# EAGLE board pcb-2d-final-final (EAGLE 9.7.0)
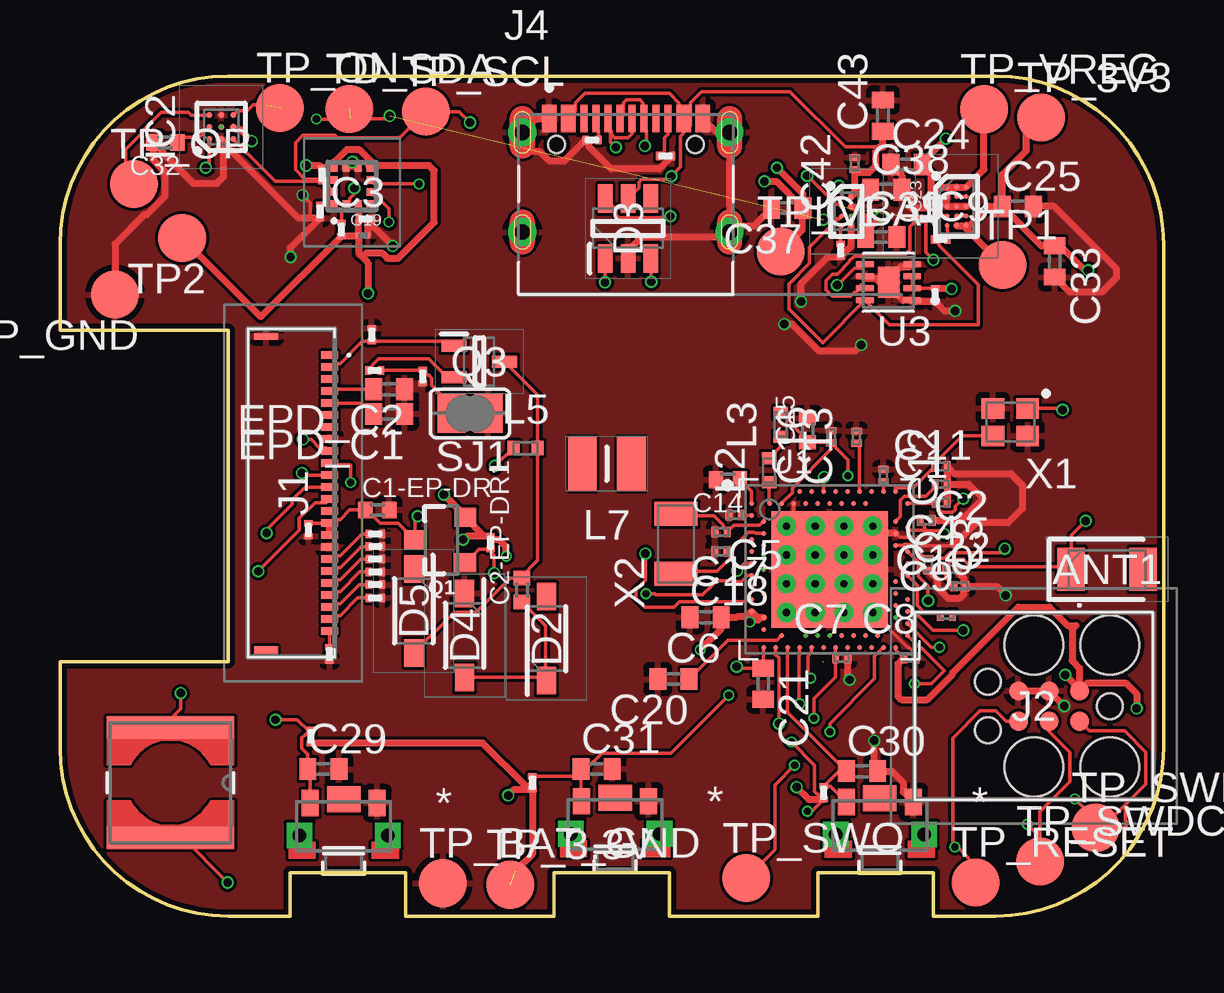
[diagram p0: board, top side]
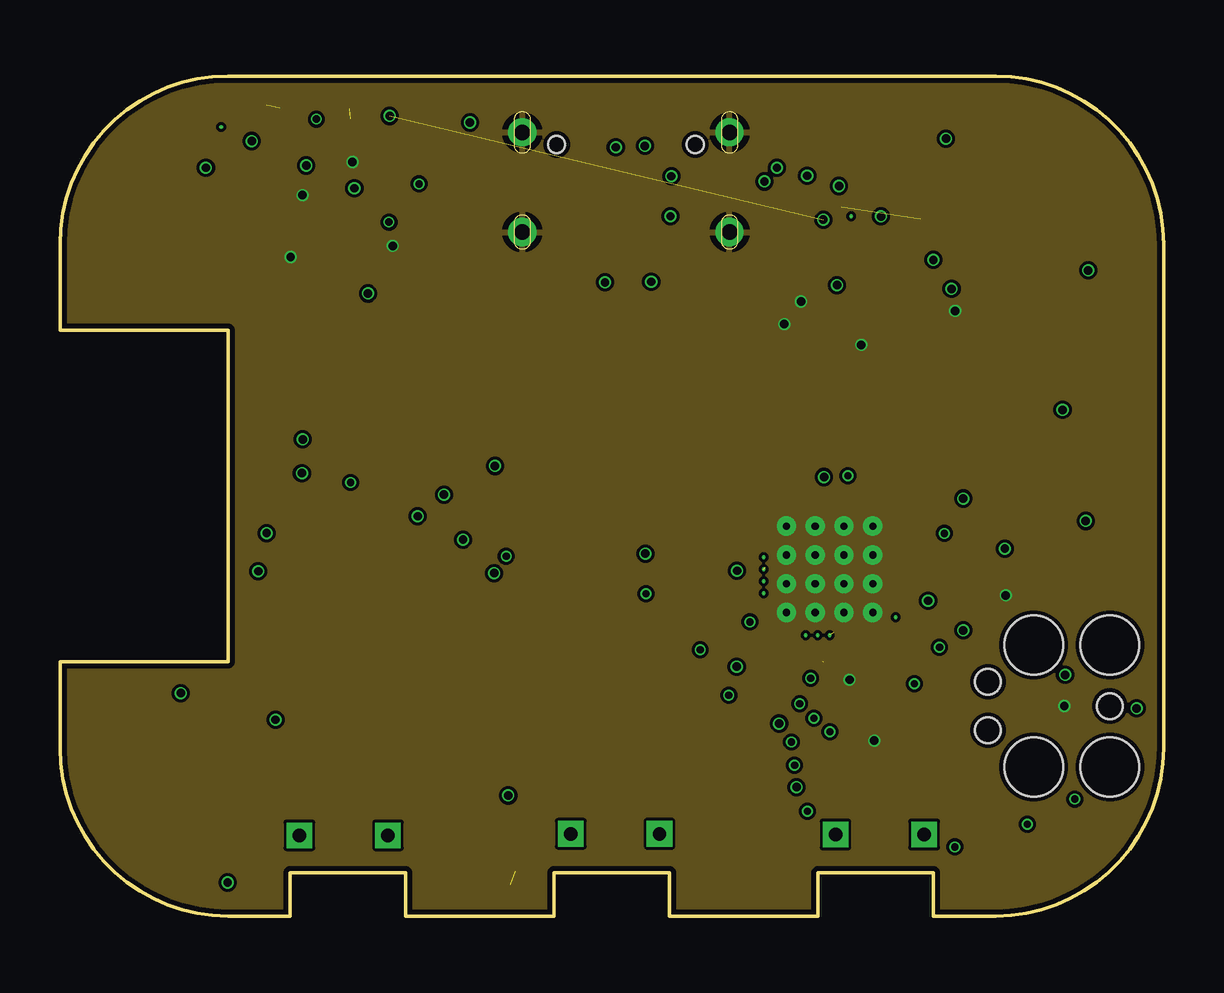
[diagram p1: board, inner layer Route2]
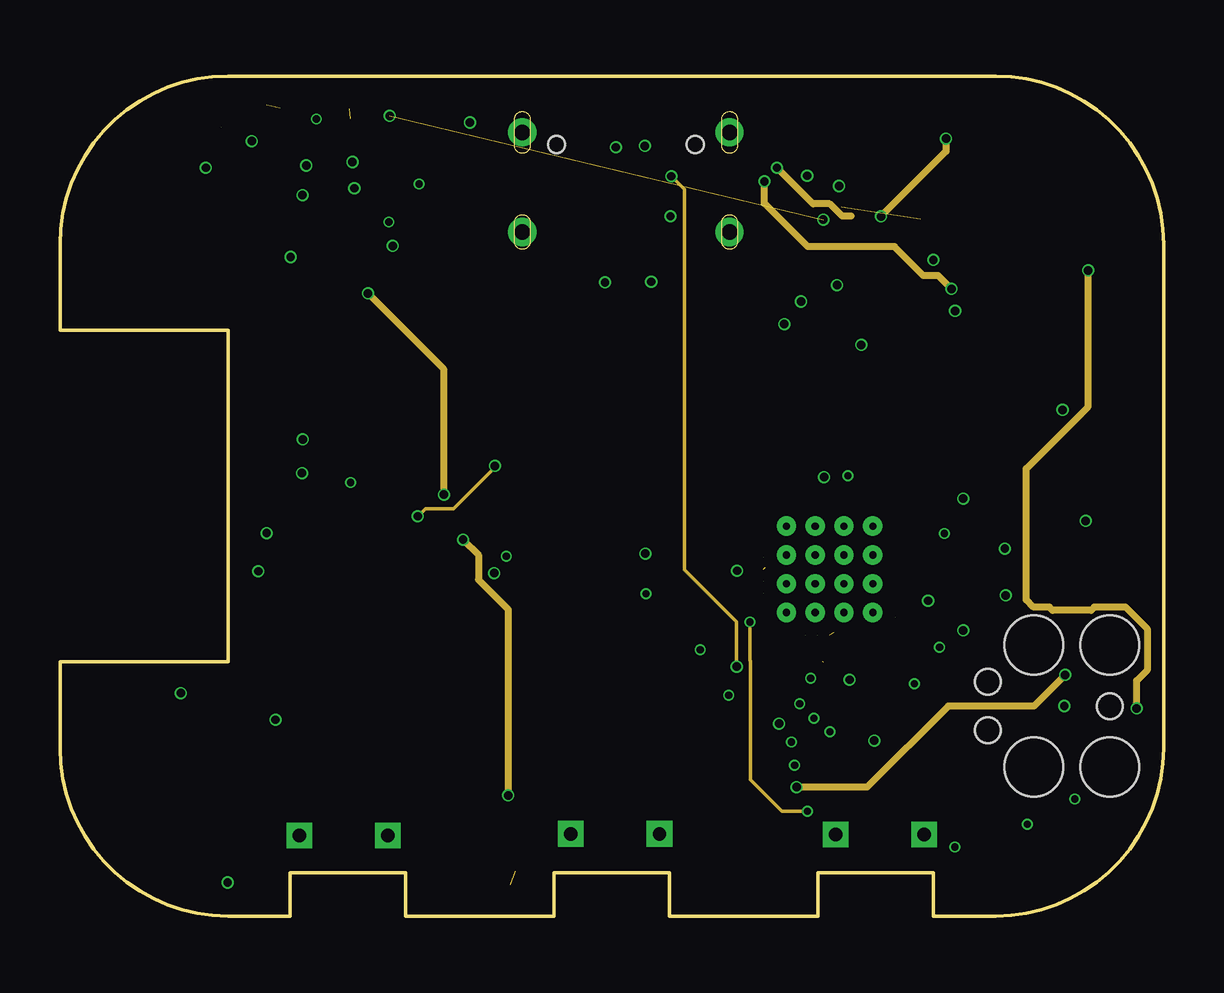
[diagram p2: board, inner layer Route15]
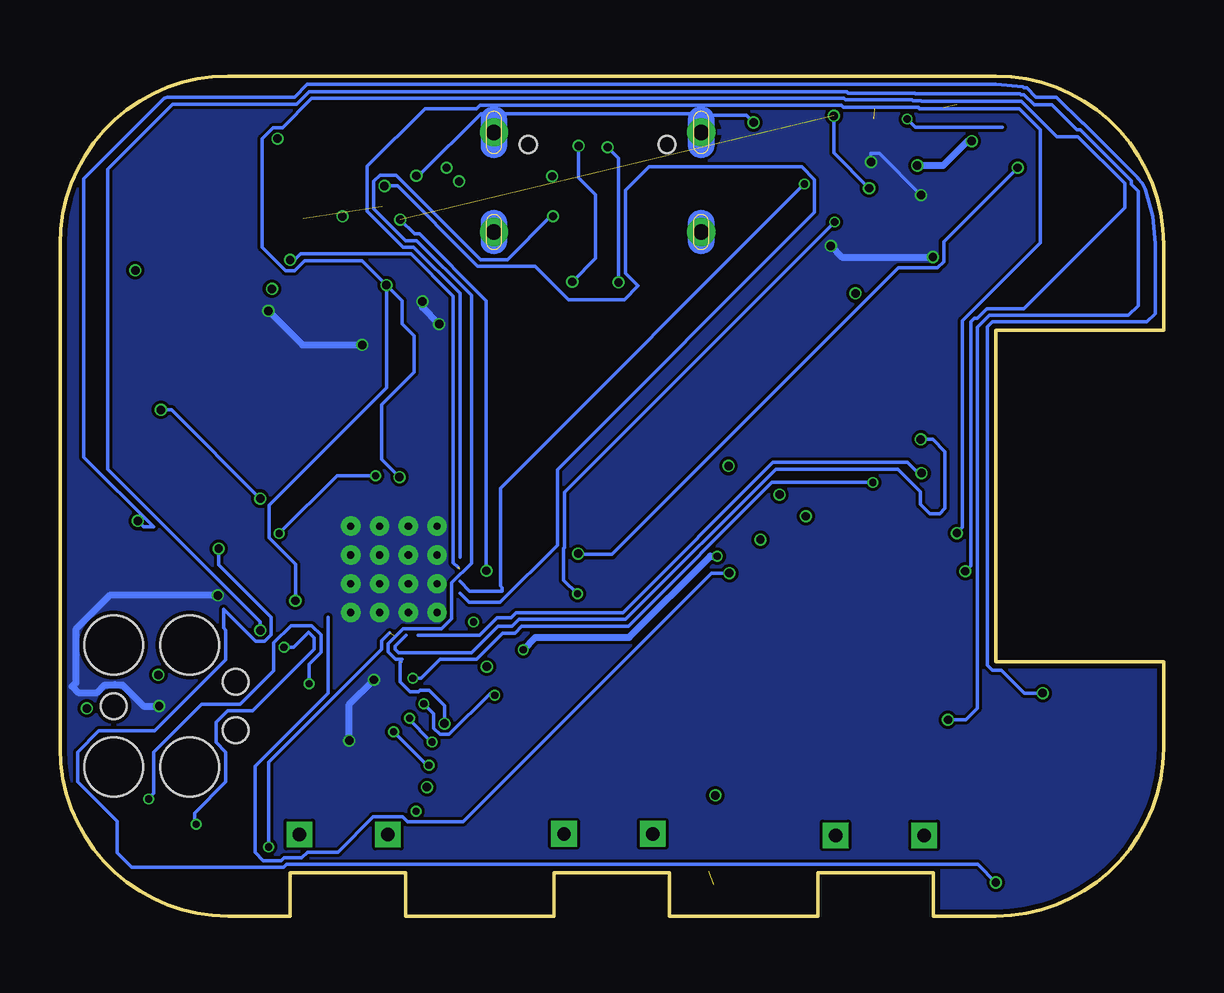
[diagram p3: board, bottom side, seen from below]

Size 46 x 35 mm. Coordinates in mm from the lower left corner, seen from the top.
Outline: 0,10.6 0,7 arc90 7,0 9.6,0 9.6,1.8 14.4,1.8 14.4,0 20.6,0 20.6,1.8 25.4,1.8 25.4,0 31.6,0 31.6,1.8 36.4,1.8 36.4,0 39,0 arc90 46,7 46,28 arc90 39,35 7,35 arc90 0,28 0,24.4 7,24.4 7,10.6 0,10.6
Copper layers ([2:1+2*15+16]): Top 0.035mm / dielectric 1.6mm / Route2 0.035mm / dielectric 0.15mm / Route15 0.035mm / dielectric 0.2mm / Bottom 0.035mm
Design rules "jlcpcb-2layers.dru *": minimum track width 5mil, minimum drill 0.3mm, track to track 5mil, track to pad 5mil, pad to pad 5mil, via to via 5mil, smd to smd 5mil, copper to edge 0.2mm, drill to drill 6mil, minimum pad ring 10mil, minimum via ring 3mil, stop-mask expansion 4mil, vias tented up to drill 0mil, thermal gap 10mil

## Footprints (pad centres in the part's own frame; a part is rotated, then mirrored left to right if it is on the bottom)
2450AT18B100E_ANTC3216X140N = smd 1.15 x 1.8: 1 -1.5,0; 2 1.5,0
NORDIC_NRF_3_RESC0201_L = smd 0.28 x 0.43: 1 -0.255,0; 2 0.255,0
PERFECT_0402_0402 = smd 0.6 x 0.7: 1 -0.5,0; 2 0.5,0
ESP32_C6_LIBRARY_1_ESP32_WROVER_EAGLE-LTSPICE_C0402 = smd 0.7 x 0.9: 1 -0.65,0; 2 0.65,0
GRM011R60J152KE01L_2_CAPC0201X13N = smd 0.22 x 0.23: 1 -0.185,0; 2 0.185,0
GRM011R60J152KE01L_1_0201 = smd 0.35 x 0.25: 1 0,0.275; 2 0,-0.275
ESP32_C6_LIBRARY_5_SOD3716X135N = smd 1.15 x 0.8: 1 -1.75,0; 2 1.75,0
ESP32_C6_LIBRARY_3_SOT95P280X145-6N = smd 1.2 x 0.6: 1 -1.25,0.95; 2 -1.25,0; 3 -1.25,-0.95; 4 1.25,-0.95; 5 1.25,0; 6 1.25,0.95
BQ25180YBGR_BGA8C40P2X4_100X155X50 = smd 0.2 x 0.2: A1 -0.2,0.6; A2 0.2,0.6; B1 -0.2,0.2; B2 0.2,0.2; C1 -0.2,-0.2; C2 0.2,-0.2; D1 -0.2,-0.6; D2 0.2,-0.6
DRV2605YZFR_BGA9C50P3X3_144X144X62 = smd 0.25 x 0.25: A1 -0.5,0.5; A2 0,0.5; A3 0.5,0.5; B1 -0.5,0; B2 0,0; B3 0.5,0; C1 -0.5,-0.5; C2 0,-0.5; C3 0.5,-0.5
BMA423_BMA423 = smd 0.3 x 0.35: 1 -0.75,-0.775; 2 -0.25,-0.775; 3 0.25,-0.775; 4 0.75,-0.775; 7 0.75,0.775; 8 0.25,0.775; 9 -0.25,0.775; 10 -0.75,0.775 | smd 0.35 x 0.3: 5 0.775,-0.25; 6 0.775,0.25; 11 -0.775,0.25; 12 -0.775,-0.25
RT6160AWSC_BGA15C40P3X5_140X230X60 = smd 0.216 x 0.216: A1 -0.4,0.8; A2 0,0.8; A3 0.4,0.8; B1 -0.4,0.4; B2 0,0.4; B3 0.4,0.4; C1 -0.4,0; C2 0,0; C3 0.4,0; D1 -0.4,-0.4; D2 0,-0.4; D3 0.4,-0.4; E1 -0.4,-0.8; E2 0,-0.8; E3 0.4,-0.8
503480-2400_5034802400 = smd 0.3 x 0.7: 1 -5.75,1.525; 2 -5.25,1.525; 3 -4.75,1.525; 4 -4.25,1.525; 5 -3.75,1.525; 6 -3.25,1.525; 7 -2.75,1.525; 8 -2.25,1.525; 9 -1.75,1.525; 10 -1.25,1.525; 11 -0.75,1.525; 12 -0.25,1.525; 13 0.25,1.525; 14 0.75,1.525; 15 1.25,1.525; 16 1.75,1.525; 17 2.25,1.525; 18 2.75,1.525; 19 3.25,1.525; 20 3.75,1.525; 21 4.25,1.525; 22 4.75,1.525; 23 5.25,1.525; 24 5.75,1.525 | smd 0.3 x 1: MP1 -6.54,-1.125; MP2 6.54,-1.125
TC2030-IDC_TC2030IDC = smd 0.783 x 0.783: 1 -0.953,-0.635; 2 -0.953,0.635; 3 0.317,-0.635; 4 0.317,0.635; 5 1.588,-0.635; 6 1.588,0.635 | hole 2.451: -2.223,-2.54; -2.223,2.54; 0.952,-2.54; 0.952,2.54 | hole 1.067: -2.223,0; 2.857,-1.016; 2.857,1.016
KH-TYPE-C-16P_KINGHELM_KH-TYPE-C-16P = smd 0.6 x 1.15: A1_B12 -3.2,4.725; A4_B9 -2.4,4.725; A9_B4 2.4,4.725; A12_B1 3.2,4.725 | smd 0.3 x 1.15: A5 -1.25,4.725; A6 -0.25,4.725; A7 0.25,4.725; A8 1.25,4.725; B5 1.75,4.725; B6 0.75,4.725; B7 -0.75,4.725; B8 -1.75,4.725 | drill 0.65 pad 1.05: SH1 -4.32,0; SH2 4.32,0; SH3 -4.32,4.15; SH4 4.32,4.15 | hole 0.7: -2.89,3.65; 2.89,3.65
ESP32_C6_LIBRARY_2_IND_4828-WE-TPC_WRE = smd 0.9 x 5.3: 1 -2.286,0; 2 2.286,0
NORDIC_NRF_2_RESC0402_L = smd 0.5 x 0.6: 1 -0.5,0; 2 0.5,0
MLP2016SR47MT0S1_INDC2016X100N = smd 1.2 x 2.2: 1 -1.028,0; 2 1.028,0
ESP32_C6_LIBRARY_4_ESP32_C6_LIBRARY_4_ESP32_C6_LIBRARY_4_ESP32_C6_LIBRARY_4_ESP32_WROVER_SPARKFUN-DISCRETESEMI_SOT23-3 = smd 0.8 x 0.9: 1 -0.95,-1; 2 0.95,-1; 3 0,1.1
ESP32_C6_LIBRARY_6_SOT65P210X110-3N = smd 1.05 x 0.5: 1 -1.05,0.65; 2 -1.05,-0.65; 3 1.05,0
CPF0201D7K68C1_0201 = smd 0.35 x 0.25: 1 0,0.275; 2 0,-0.275
ESP32_C6_LIBRARY_7_JUMPER_SJ = smd 1.168 x 1.6: 1 -0.762,0; 2 0.762,0
2025-10-22_07-23-44_LIBRARY_SW_EVP-AKE31A_PAN = smd 0.711 x 1.092: 1 -1.4,-0.972; 2 1.4,-0.972 | drill 0.559 pad 0.914 square: 3 -1.848,0.381; 4 1.848,0.381 | smd 1.397 x 1.092: 5 0,-1.124
HECTOR_WATCH_1_TP20R = smd 2 x 2: TP 0,0
NORDIC_NRF_4_AQFN50P700X700X85_HS-74N = smd 4.85 x 4.85: P$74 0,0 | drill 0.3 pad 0.6: P$75 -1.8,1.8; P$76 -0.6,1.8; P$77 0.6,1.8; P$78 1.8,1.8; P$79 -1.8,0.6; P$80 -0.6,0.6; P$81 0.6,0.6; P$82 1.8,0.6; P$83 -1.8,-0.6; P$84 -0.6,-0.6; P$85 0.6,-0.6; P$86 1.8,-0.6; P$87 -1.8,-1.8; P$88 -0.6,-1.8; P$89 0.6,-1.8; P$90 1.8,-1.8 | smd 0.2 x 0.2: P$A8 -1.25,3.25; P$A10 -0.75,3.25; P$A12 -0.25,3.25; P$A14 0.25,3.25; P$A16 0.75,3.25; P$A18 1.25,3.25; P$A20 1.75,3.25; P$A22 2.25,3.25; P$A23 2.75,3.25; P$AA24 3.25,-2.25; P$AB2 -2.75,-2.5; P$AC5 -2,-2.75; P$AC9 -1,-2.75; P$AC11 -0.5,-2.75; P$AC13 0,-2.75; P$AC15 0.5,-2.75; P$AC17 1,-2.75; P$AC19 1.5,-2.75; P$AC21 2,-2.75; P$AC24 3.25,-2.75; P$AD2 -2.75,-3.25; P$AD4 -2.25,-3.25; P$AD6 -1.75,-3.25; P$AD8 -1.25,-3.25; P$AD10 -0.75,-3.25; P$AD12 -0.25,-3.25; P$AD14 0.25,-3.25; P$AD16 0.75,-3.25; P$AD18 1.25,-3.25; P$AD20 1.75,-3.25; P$AD22 2.25,-3.25; P$AD23 2.75,-3.25; P$B1 -3.25,2.75; P$B3 -2.5,2.75; P$B5 -2,2.75; P$B7 -1.5,2.75; P$B9 -1,2.75; P$B11 -0.5,2.75; P$B13 0,2.75; P$B15 0.5,2.75; P$B17 1,2.75; P$B19 1.5,2.75; P$B24 3.25,2.75; P$C1 -3.25,2.25; P$D2 -2.75,2; P$D23 2.75,2; P$E24 3.25,1.75; P$F2 -2.75,1.5; P$F23 2.75,1.5; P$G1 -3.25,1.25; P$H2 -2.75,1; P$H23 2.75,1; P$J1 -3.25,0.75; P$J24 3.25,0.75; P$K2 -2.75,0.5; P$L1 -3.25,0.25; P$L24 3.25,0.25; P$M2 -2.75,0; P$N1 -3.25,-0.25; P$N24 3.25,-0.25; P$P2 -2.75,-0.5; P$P23 2.75,-0.5; P$R1 -3.25,-0.75; P$R24 3.25,-0.75; P$T2 -2.75,-1; P$T23 2.75,-1; P$U1 -3.25,-1.25; P$U24 3.25,-1.25; P$V23 2.75,-1.5; P$W1 -3.25,-1.75; P$W24 3.25,-1.75; P$Y2 -2.75,-2; P$Y23 2.75,-2
ESP32_C6_LIBRARY_SON50P200X200X80-9N = smd 0.76 x 0.27: 1 -0.985,0.75; 2 -0.985,0.25; 3 -0.985,-0.25; 4 -0.985,-0.75; 5 0.985,-0.75; 6 0.985,-0.25; 7 0.985,0.25; 8 0.985,0.75 | smd 0.9 x 1.3: 9 0,0
NORDIC_NRF_BT-XTAL_2016_N = smd 0.95 x 0.85: 1 -0.725,-0.575; 2 0.725,-0.575; 3 0.725,0.575; 4 -0.725,0.575
NORDIC_NRF_1_XTAL_3215_N = smd 1 x 1.8: 1 -1.25,0; 2 1.25,0

## Placement (x,y rotation side)
ANT1  2450AT18B100E  [2450AT18B100E_ANTC3216X140N]  43.65,14.44 0 top
C1  12pF  [NORDIC_NRF_3_RESC0201_L]  36.73,17.23 0 top
C1-EP-DR  10uF  [PERFECT_0402_0402]  13.22,16.92 0 top
C2  12pF  [NORDIC_NRF_3_RESC0201_L]  36.72,18.73 180 top
C2-EP-DR1  4.7uF/25V  [PERFECT_0402_0402]  19.25,13.58 90 top
C3  1pF  [NORDIC_NRF_3_RESC0201_L]  36.19,14.65 270 top
C4  1pF  [NORDIC_NRF_3_RESC0201_L]  37.18,14.45 0 top
C5  100nF  [NORDIC_NRF_3_RESC0201_L]  28.14,16.71 180 top
C6  4.7µF  [ESP32_C6_LIBRARY_1_ESP32_WROVER_EAGLE-LTSPICE_C0402]  26.91,12.45 180 top
C7  100nF  [NORDIC_NRF_3_RESC0201_L]  32.59,10.75 0 top
C8  100nF  [NORDIC_NRF_3_RESC0201_L]  35.43,10.76 0 top
C9  820pF  [NORDIC_NRF_3_RESC0201_L]  36.95,12.53 0 top
C10  N.C  [NORDIC_NRF_3_RESC0201_L]  36.11,16.48 180 top
C11  100pF  [NORDIC_NRF_3_RESC0201_L]  36.73,17.99 0 top
C12  100nF  [NORDIC_NRF_3_RESC0201_L]  34.33,18.36 270 top
C13  N.C  [NORDIC_NRF_3_RESC0201_L]  33.2,19.95 90 top
C14  4.7µF  [PERFECT_0402_0402]  27.84,18.17 180 top
C15  1.0µF  [PERFECT_0402_0402]  31.16,20.24 90 top
C16  47nF  [NORDIC_NRF_3_RESC0201_L]  32.14,19.97 90 top
C17  12pF  [NORDIC_NRF_3_RESC0201_L]  27.56,16 180 top
C18  12pF  [NORDIC_NRF_3_RESC0201_L]  27.55,15.19 180 top
C19  100nF  [GRM011R60J152KE01L_2_CAPC0201X13N]  12.64,28.34 0 top
C20  4.7µF  [ESP32_C6_LIBRARY_1_ESP32_WROVER_EAGLE-LTSPICE_C0402]  25.57,9.88 180 top
C21  4.7µF  [ESP32_C6_LIBRARY_1_ESP32_WROVER_EAGLE-LTSPICE_C0402]  29.31,9.68 270 top
C22  [NORDIC_NRF_3_RESC0201_L]  37.52,13.74 0 top
C23  0.1uF  [GRM011R60J152KE01L_2_CAPC0201X13N]  36.33,29.88 90 top
C24  10uF  [ESP32_C6_LIBRARY_1_ESP32_WROVER_EAGLE-LTSPICE_C0402]  35.29,31.31 0 top
C25  22uF  [ESP32_C6_LIBRARY_1_ESP32_WROVER_EAGLE-LTSPICE_C0402]  39.93,29.56 0 top
C27  0.1uF  [GRM011R60J152KE01L_1_0201]  36.48,25.88 180 top
C29  1uF  [ESP32_C6_LIBRARY_1_ESP32_WROVER_EAGLE-LTSPICE_C0402]  10.98,6.12 0 top
C30  1uF  [ESP32_C6_LIBRARY_1_ESP32_WROVER_EAGLE-LTSPICE_C0402]  33.43,6.04 0 top
C31  1uF  [ESP32_C6_LIBRARY_1_ESP32_WROVER_EAGLE-LTSPICE_C0402]  22.37,6.13 0 top
C32  1uF  [PERFECT_0402_0402]  4.39,32.23 180 top
C33  22uF  [ESP32_C6_LIBRARY_1_ESP32_WROVER_EAGLE-LTSPICE_C0402]  41.46,27.27 270 top
C34  0.1uF  [GRM011R60J152KE01L_1_0201]  12.73,29.04 270 top
C37  [ESP32_C6_LIBRARY_1_ESP32_WROVER_EAGLE-LTSPICE_C0402]  30.32,29.5 180 top
C38  1uF  [ESP32_C6_LIBRARY_1_ESP32_WROVER_EAGLE-LTSPICE_C0402]  34.44,30.26 0 top
C39  10uF  [ESP32_C6_LIBRARY_1_ESP32_WROVER_EAGLE-LTSPICE_C0402]  34.23,28.3 0 top
C42  0.1uF  [NORDIC_NRF_3_RESC0201_L]  33.13,31.35 90 top
C43  4.7uF  [ESP32_C6_LIBRARY_1_ESP32_WROVER_EAGLE-LTSPICE_C0402]  34.3,33.35 90 top
D2  MBR0530  [ESP32_C6_LIBRARY_5_SOD3716X135N]  20.28,11.56 90 top
D3  USBLC6-2SC6Y  [ESP32_C6_LIBRARY_3_SOT95P280X145-6N]  23.68,28.65 90 top
D4  MBR0530  [ESP32_C6_LIBRARY_5_SOD3716X135N]  16.87,11.69 270 top
D5  MBR0530  [ESP32_C6_LIBRARY_5_SOD3716X135N]  14.75,12.71 270 top
EPD_C1  1uF/50V  [ESP32_C6_LIBRARY_1_ESP32_WROVER_EAGLE-LTSPICE_C0402]  13.72,20.92 180 top
EPD_C2  1uF/50V  [ESP32_C6_LIBRARY_1_ESP32_WROVER_EAGLE-LTSPICE_C0402]  13.72,21.95 180 top
EPD_C5  0.1uF/50V  [GRM011R60J152KE01L_1_0201]  10.36,16.09 180 top
EPD_C6  0.1uF/50V  [GRM011R60J152KE01L_1_0201]  13.14,15.91 270 top
EPD_C7  0.1uF/50V  [GRM011R60J152KE01L_1_0201]  13.14,15.39 270 top
EPD_C8  0.1uF/50V  [GRM011R60J152KE01L_1_0201]  13.14,14.87 270 top
EPD_C9  0.1uF/50V  [GRM011R60J152KE01L_1_0201]  13.14,14.34 270 top
EPD_C10  0.1uF/50V  [GRM011R60J152KE01L_1_0201]  13.14,13.81 270 top
EPD_C11  0.1uF/50V  [GRM011R60J152KE01L_1_0201]  13.14,13.25 270 top
EPD_C12  0.1uF/50V  [GRM011R60J152KE01L_1_0201]  11.23,10.92 180 top
IC1  BQ25180YBGR  [BQ25180YBGR_BGA8C40P2X4_100X155X50]  32.78,29.36 0 top
IC2  DRV2605YZFR  [DRV2605YZFR_BGA9C50P3X3_144X144X62]  6.72,32.87 90 top
IC3  BMA421  [BMA423_BMA423]  12.18,30.42 0 top
IC9  RT6160AWSC  [RT6160AWSC_BGA15C40P3X5_140X230X60]  37.38,29.57 0 top
J1  503480-2400  [503480-2400_5034802400]  9.72,17.62 270 top
J2  TC2030-IDC_TC2030-IDC  [TC2030-IDC_TC2030IDC]  41.54,8.75 180 top
J4  KH-TYPE-C-16P  [KH-TYPE-C-16P_KINGHELM_KH-TYPE-C-16P]  23.59,28.5 0 top
L1  3.9nH  [ESP32_C6_LIBRARY_2_IND_4828-WE-TPC_WRE]  4.61,5.56 270 top
L2  10µH  [NORDIC_NRF_2_RESC0402_L]  29.56,18.58 90 top
L3  15nH  [NORDIC_NRF_2_RESC0402_L]  30.04,20.47 90 top
L5  68uH  [NORDIC_NRF_2_RESC0402_L]  19.42,19.5 0 top
L7  FTC252012SR47MBCA  [MLP2016SR47MT0S1_INDC2016X100N]  22.8,18.85 0 top
Q1  20V/4.2A/52mΩ/1.4W  [ESP32_C6_LIBRARY_4_ESP32_C6_LIBRARY_4_ESP32_C6_LIBRARY_4_ESP32_C6_LIBRARY_4_ESP32_WROVER_SPARKFUN-DISCRETESEMI_SOT23-3]  15.9,15.67 90 top
Q3  SI1308EDL-T1-GE3  [ESP32_C6_LIBRARY_6_SOT65P210X110-3N]  17.48,23.1 0 top
R1_EP_DR1  0.47  [CPF0201D7K68C1_0201]  13.11,22.73 270 top
R1_USB  5K1  [CPF0201D7K68C1_0201]  22.18,32.34 90 top
R2  0  [CPF0201D7K68C1_0201]  36.7,28.19 90 top
R2_EP_DR  10K  [CPF0201D7K68C1_0201]  12.99,24.22 0 top
R2_USB  5K1  [CPF0201D7K68C1_0201]  25.25,31.66 90 top
R3  0  [CPF0201D7K68C1_0201]  10.85,29.36 180 top
R4  0  [CPF0201D7K68C1_0201]  36.14,29.05 90 top
R5  10K  [CPF0201D7K68C1_0201]  31.83,5.13 0 top
R7  10K  [CPF0201D7K68C1_0201]  10.45,7.48 0 top
R8  10K  [CPF0201D7K68C1_0201]  19.7,5.55 0 top
R9  10K  [CPF0201D7K68C1_0201]  32.54,27.74 180 top
R17  3K3  [CPF0201D7K68C1_0201]  10.93,30.89 0 top
R18  3K3  [CPF0201D7K68C1_0201]  11.73,28.61 180 top
R_PWR_EPD  10K  [CPF0201D7K68C1_0201]  17.95,15.56 180 top
R_TYPE_SEL  2.2  [CPF0201D7K68C1_0201]  15.12,22.48 180 top
SJ1  [ESP32_C6_LIBRARY_7_JUMPER_SJ]  17.09,20.94 180 top
SW_DN12  2025-10-22_07-23-44_LIBRARY_EVP-AKE31ASW_EVP-AKE31A_PAN  [2025-10-22_07-23-44_LIBRARY_SW_EVP-AKE31A_PAN]  11.83,3.74 180 top
SW_ENT  2025-10-22_07-23-44_LIBRARY_EVP-AKE31ASW_EVP-AKE31A_PAN  [2025-10-22_07-23-44_LIBRARY_SW_EVP-AKE31A_PAN]  23.14,3.81 180 top
SW_UP  2025-10-22_07-23-44_LIBRARY_EVP-AKE31ASW_EVP-AKE31A_PAN  [2025-10-22_07-23-44_LIBRARY_SW_EVP-AKE31A_PAN]  34.17,3.78 180 top
TD_SDA  HECTOR_WATCH_1_TPTP20R  [HECTOR_WATCH_1_TP20R]  12.06,33.63 0 top
TP1  HECTOR_WATCH_1_TPTP20R  [HECTOR_WATCH_1_TP20R]  39.3,27.12 0 top
TP2  HECTOR_WATCH_1_TPTP20R  [HECTOR_WATCH_1_TP20R]  5.09,28.25 180 top
TP_3.3V  HECTOR_WATCH_1_TPTP20R  [HECTOR_WATCH_1_TP20R]  18.76,1.3 0 top
TP_3V3  HECTOR_WATCH_1_TPTP20R  [HECTOR_WATCH_1_TP20R]  40.89,33.26 0 top
TP_BAT_GND  HECTOR_WATCH_1_TPTP20R  [HECTOR_WATCH_1_TP20R]  15.97,1.36 0 top
TP_GND  HECTOR_WATCH_1_TPTP20R  [HECTOR_WATCH_1_TP20R]  2.29,25.89 180 top
TP_ON  HECTOR_WATCH_1_TPTP20R  [HECTOR_WATCH_1_TP20R]  9.17,33.67 0 top
TP_OP  HECTOR_WATCH_1_TPTP20R  [HECTOR_WATCH_1_TP20R]  3.09,30.5 0 top
TP_RESET  HECTOR_WATCH_1_TPTP20R  [HECTOR_WATCH_1_TP20R]  38.16,1.41 0 top
TP_SCL  HECTOR_WATCH_1_TPTP20R  [HECTOR_WATCH_1_TP20R]  15.25,33.51 0 top
TP_SWDCLK  HECTOR_WATCH_1_TPTP20R  [HECTOR_WATCH_1_TP20R]  40.85,2.28 0 top
TP_SWDIO  HECTOR_WATCH_1_TPTP20R  [HECTOR_WATCH_1_TP20R]  43.16,3.68 0 top
TP_SWO  HECTOR_WATCH_1_TPTP20R  [HECTOR_WATCH_1_TP20R]  28.61,1.58 0 top
TP_VBAT  HECTOR_WATCH_1_TPTP20R  [HECTOR_WATCH_1_TP20R]  30.05,27.69 0 top
TP_VREG  HECTOR_WATCH_1_TPTP20R  [HECTOR_WATCH_1_TP20R]  38.52,33.61 0 top
U1  NRF52840_QF  [NORDIC_NRF_4_AQFN50P700X700X85_HS-74N]  32.08,14.45 0 top
U3  MAX17048G+T10  [ESP32_C6_LIBRARY_SON50P200X200X80-9N]  34.54,26.4 180 top
X1  32MHz  [NORDIC_NRF_BT-XTAL_2016_N]  39.61,20.58 180 top
X2  32.768kHz  [NORDIC_NRF_1_XTAL_3215_N]  25.67,15.51 90 top

## Library data of the parts
ANT1 = InkTime_v5; ARROW_PART_NUMBER: 2450AT18B100E; ARROW_PRICE-STOCK: https://www.arrow.com/en/products/2450at18b100e/johanson-dielectrics?utm_currency=USD&region=nac; DESCRIPTION: Antennas 2.45GHz ANTENNA; HEIGHT: 1.4mm; MANUFACTURER_NAME: JOHANSON TECHNOLOGY; MANUFACTURER_PART_NUMBER: 2450AT18B100E; MOUSER_PART_NUMBER: 609-2450AT18B100E; MOUSER_PRICE-STOCK: https://www.mouser.co.uk/ProductDetail/Johanson-Technology/2450AT18B100E?qs=yCnrNFeXz%252Bh5MFsFIXGZGA%3D%3D
C1 C1-EP-DR C2 C2-EP-DR1 C3-C5 C7-C18 C22 C27 C32 C34 C42 EPD_C5-EPD_C12 L2 L3 L5 R1_EP_DR1 R1_USB R2 R2_EP_DR R2_USB R3-R5 R7-R9 R17 R18 R_PWR_EPD R_TYPE_SEL SJ1 TD_SDA TP1 TP2 TP_3.3V TP_3V3 TP_BAT_GND TP_GND TP_ON TP_OP TP_RESET TP_SCL TP_SWDCLK TP_SWDIO TP_SWO TP_VBAT TP_VREG U1 X1 X2 = InkTime_v5
C6 C20 C21 C24 C25 C29-C31 C33 C37-C39 C43 EPD_C1 EPD_C2 = InkTime_v5; SPICEMODEL: NONE; SPICEPREFIX: C
C19 C23 = InkTime_v5; AVAILABILITY: In Stock; CHECK_PRICES: https://www.snapeda.com/parts/GRM011R60J152KE01L/Murata/view-part/?ref=eda; DESCRIPTION: SMD Capacitor X5R(EIA) with Capacitance: 1500pF Tol. 10%. Rated Voltage: 6.3Vdc; MF: Murata; MP: GRM011R60J152KE01L; PACKAGE: 0201 Murata; PRICE: None; SNAPEDA_LINK: https://www.snapeda.com/parts/GRM011R60J152KE01L/Murata/view-part/?ref=snap
D2 D4 D5 = InkTime_v5; AVAILABILITY: In Stock; CHECK_PRICES: https://www.snapeda.com/parts/MBR0530/Onsemi/view-part/?ref=eda; DESCRIPTION: Diode Schottky 30 V 500mA Surface Mount SOD-123; MF: ON Semiconductor; MP: MBR0530; PACKAGE: SOD-123-2 ON Semiconductor; PRICE: None; PURCHASE-URL: https://www.snapeda.com/api/url_track_click_mouser/?unipart_id=179458&manufacturer=ON Semiconductor&part_name=MBR0530&search_term=None; SNAPEDA_LINK: https://www.snapeda.com/parts/MBR0530/Onsemi/view-part/?ref=snap
D3 = InkTime_v5; AVAILABILITY: In Stock; CHECK_PRICES: https://www.snapeda.com/parts/USBLC6-2SC6Y/STMicroelectronics/view-part/?ref=eda; DESCRIPTION: 17V Clamp 5A (8/20µs) Ipp Tvs Diode Surface Mount SOT-23-6; MF: STMicroelectronics; MP: USBLC6-2SC6Y; PACKAGE: SOT-23-6 STMicroelectronics; PRICE: None; SNAPEDA_LINK: https://www.snapeda.com/parts/USBLC6-2SC6Y/STMicroelectronics/view-part/?ref=snap
IC1 = InkTime_v5; ARROW_PART_NUMBER: BQ25180YBGR; ARROW_PRICE-STOCK: https://www.arrow.com/en/products/bq25180ybgr/texas-instruments?utm_currency=USD&region=nac; DESCRIPTION: Charger IC Lithium Ion/Polymer, Lithium Iron Phosphate 8-DSBGA (1.6x1.1); HEIGHT: 0.5mm; MANUFACTURER_NAME: Texas Instruments; MANUFACTURER_PART_NUMBER: BQ25180YBGR; MOUSER_PART_NUMBER: 595-BQ25180YBGR; MOUSER_PRICE-STOCK: https://www.mouser.co.uk/ProductDetail/Texas-Instruments/BQ25180YBGR?qs=doiCPypUmgEWjAK%252BJAX6Tw%3D%3D
IC2 = InkTime_v5; ARROW_PART_NUMBER: DRV2605YZFR; ARROW_PRICE-STOCK: https://www.arrow.com/en/products/drv2605yzfr/texas-instruments?region=nac; DESCRIPTION: Haptic Driver for ERM/LRA with Built-In Library and Smart Loop Architecture; HEIGHT: 0.625mm; MANUFACTURER_NAME: Texas Instruments; MANUFACTURER_PART_NUMBER: DRV2605YZFR
IC3 = InkTime_v5; ARROW_PART_NUMBER: BMA423; ARROW_PRICE-STOCK: https://www.arrow.com/en/products/bma423/bosch; DESCRIPTION: Accelerometers Triaxial low-g 12bit Acceleration Sensor; HEIGHT: 1mm; MANUFACTURER_NAME: BOSCH; MANUFACTURER_PART_NUMBER: BMA423; MOUSER_PART_NUMBER: 262-BMA423; MOUSER_PRICE-STOCK: https://www.mouser.co.uk/ProductDetail/Bosch-Sensortec/BMA423?qs=HXFqYaX1Q2xC%252BSgeGoX3mg%3D%3D
IC9 = InkTime_v5; DESCRIPTION: Buck-Boost Regulator Positive Output Step-Up/Step-Down I2C DC-DC Controller IC 15-WL-CSP (BSC) (1.4x2.3); HEIGHT: 0.6mm; MANUFACTURER_NAME: RICHTEK; MANUFACTURER_PART_NUMBER: RT6160AWSC; MOUSER_PART_NUMBER: 835-RT6160AWSC; MOUSER_PRICE-STOCK: https://www.mouser.co.uk/ProductDetail/Richtek/RT6160AWSC?qs=amGC7iS6iy%2FLd9PSoixZXQ%3D%3D
J1 = InkTime_v5; DESCRIPTION: FFC & FPC Connectors 0.5mm FPC RA SMT Dual Contact 24Ckt; HEIGHT: 1.87mm; MANUFACTURER_NAME: Molex; MANUFACTURER_PART_NUMBER: 503480-2400; MOUSER_PART_NUMBER: 538-503480-2400; MOUSER_PRICE-STOCK: https://www.mouser.co.uk/ProductDetail/Molex/503480-2400?qs=OAhjpuo3Vu7efIoxFh9AOw%3D%3D
J2 = InkTime_v5; DESCRIPTION: CABLE ADAPTER 6 POS; HEIGHT: 19mm; MANUFACTURER_NAME: Tag Connect; MANUFACTURER_PART_NUMBER: TC2030-IDC
J4 = InkTime_v5; AVAILABILITY: Not in stock; CHECK_PRICES: https://www.snapeda.com/parts/KH-TYPE-C-16P/Kinghelm/view-part/?ref=eda; MF: kinghelm; MP: KH-TYPE-C-16P; PACKAGE: None; PRICE: None; SNAPEDA_LINK: https://www.snapeda.com/parts/KH-TYPE-C-16P/Kinghelm/view-part/?ref=snap
L1 = InkTime_v5; COPYRIGHT: Copyright (C) 2024 Ultra Librarian. All rights reserved.; MANUFACTURER_PART_NUMBER: 744043680; MFR_NAME: Wurth Electronics
L7 = InkTime_v5; DESCRIPTION: SMD / SMT Inductors (Coils), L=0.47?H, L x W x T :; HEIGHT: 1mm; JLCPCB: https://jlcpcb.com/partdetail/6763488-FTC252012SR47MBCA/C5832368; MANUFACTURER_NAME: TDK; MANUFACTURER_PART_NUMBER: FTC252012SR47MBCA
Q1 = InkTime_v5; PROD_ID: TRAN-14388
Q3 = InkTime_v5; AVAILABILITY: In Stock; CHECK_PRICES: https://www.snapeda.com/parts/SI1308EDL-T1-GE3/Vishay+Siliconix/view-part/?ref=eda; DESCRIPTION: Si1308EDL-T1-GE3 N-channel MOSFET Transistor, 1.5 A, 30 V, 3-Pin SC-70 | Siliconix / Vishay SI1308EDL-T1-GE3; MF: Vishay Siliconix; MP: SI1308EDL-T1-GE3; PACKAGE: SOT-323 Vishay Semiconductor; PRICE: None; PURCHASE-URL: https://www.snapeda.com/api/url_track_click_mouser/?unipart_id=274603&manufacturer=Vishay Siliconix&part_name=SI1308EDL-T1-GE3&search_term=None; SNAPEDA_LINK: https://www.snapeda.com/parts/SI1308EDL-T1-GE3/Vishay+Siliconix/view-part/?ref=snap
SW_DN12 SW_ENT SW_UP = InkTime_v5; COPYRIGHT: Copyright (C) 2025 Ultra Librarian. All rights reserved.; DIGI-KEY_PART_NUMBER_1: P123437TR-ND; DIGI-KEY_PART_NUMBER_2: P123437CT-ND; DIGI-KEY_PART_NUMBER_3: P123437DKR-ND; MANUFACTURER_NAME: Panasonic; MANUFACTURER_PART_NUMBER: EVP-AKE31A
U3 = InkTime_v5; AVAILABILITY: In Stock; CHECK_PRICES: https://www.snapeda.com/parts/MAX17048G+T10/Analog+Devices/view-part/?ref=eda; DESCRIPTION: 3µA 1-Cell/2-Cell Fuel Gauge with ModelGauge; MF: Analog Devices; MP: MAX17048G+T10; PACKAGE: TDFN-8 Maxim; PRICE: None; PURCHASE-URL: https://www.snapeda.com/api/url_track_click_mouser/?unipart_id=329239&manufacturer=Analog Devices&part_name=MAX17048G+T10&search_term=None; SNAPEDA_LINK: https://www.snapeda.com/parts/MAX17048G+T10/Analog+Devices/view-part/?ref=snap

## Nets
3V3: C6.1 C7.1 C8.1 C19.1 C25.1 C33.1 C34.2 IC2.C2 IC3.3 IC3.7 IC3.10 IC9.E2 IC9.E3 J2.1 Q1.2 R5.2 R7.2 R8.2 R17.1 R18.1 R_PWR_EPD.2 TP1.TP TP2.TP TP_3.3V.TP TP_3V3.TP U1.P$AD14 U1.P$AD23 U1.P$W1 U1.P$Y2
ALERT: U1.P$J24 U3.5
D+: D3.4
D-: D3.6 U1.P$AD4
DEC1: C5.1 U1.P$C1
DFC3: C11.1 U1.P$D23
DFC4_6: C10.2 C15.1 C16.1 L3.2 U1.P$B5 U1.P$E24
DN: D3.1 J4.A7 J4.B7
DP: D3.3 J4.A6 J4.B6
EPD_3V3: C1-EP-DR.1 EPD_C5.2 J1.15 J1.16 L5.1 Q1.3
EPD_BUSY: J1.9 U1.P$AC11
EPD_CS: J1.12 U1.P$K2
EPD_DC: J1.11 U1.P$AC9
EPD_RST: J1.10 U1.P$AD10
GDR: J1.2 Q3.1 R2_EP_DR.2
GND: C1-EP-DR.2 C1.2 C2.1 C3.2 C4.2 C5.2 C6.2 C7.2 C8.2 C10.1 C11.2 C12.1 C13.2 C14.2 C15.2 C16.2 C17.2 C18.2 C19.2 C20.2 C21.2 C22.2 C23.1 C24.1 C25.2 C27.1 C29.2 C30.2 C31.2 C32.2 C33.2 C34.1 C37.2 C38.2 C39.2 C42.2 C43.2 D3.2 D4.1 EPD_C1.1 EPD_C2.1 EPD_C5.1 EPD_C6.1 EPD_C7.1 EPD_C8.1 EPD_C9.1 EPD_C10.1 EPD_C11.1 EPD_C12.1 IC1.D2 IC2.B1 IC2.B3 IC3.8 IC3.9 IC9.B1 IC9.C1 IC9.C2 IC9.C3 J1.8 J1.17 J1.MP1 J2.3 J2.5 J4.A1_B12 J4.A12_B1 J4.SH1 J4.SH2 J4.SH3 J4.SH4 R1_USB.1 R2_EP_DR.1 R2_USB.2 R3.1 R9.1 R_TYPE_SEL.1 SJ1.1 SW_DN12.1 SW_ENT.1 SW_UP.1 TP_BAT_GND.TP TP_GND.TP U1.P$74 U1.P$75 U1.P$76 U1.P$77 U1.P$78 U1.P$79 U1.P$80 U1.P$81 U1.P$82 U1.P$83 U1.P$84 U1.P$85 U1.P$86 U1.P$87 U1.P$88 U1.P$89 U1.P$90 U1.P$B7 U1.P$F23 U3.1 U3.4 U3.6 U3.9 X1.2 X1.4
GSE: J1.3
HAPTIC_EN: IC2.A1 U1.P$U1
IMU_INT1: IC3.5 U1.P$N1
IMU_INT2: IC3.6 U1.P$P2
LX1: IC9.B2 IC9.B3
LX2: IC9.D2 IC9.D3
MOS: U1.P$B13
MOSI: J1.14
N$1: IC3.1 R3.2
N$2: IC1.D1 R9.2
N$3: IC9.D1 R4.2
N$4: IC9.E1 R2.2
N$5: L7.1
N$6: L7.2
N$7: C17.1 U1.P$D2 X2.2
N$8: C18.1 U1.P$F2 X2.1
N$9: C20.1 U1.P$AC5
N$10: C9.1 U1.P$N24
N$11: C3.1 L1.2 U1.P$H23
N$12: C1.1 U1.P$B24 X1.1
N$13: C2.2 U1.P$A23 X1.3
N$14: C14.1 U1.P$B1
N$15: L2.1 U1.P$B3
N$16: U1.P$AD12
N$17: L2.2 L3.1
N$18: C13.1 U1.P$A18
N$19: C12.2 U1.P$A22
N$20: C2-EP-DR1.2 D5.2 L5.2 Q3.3
N$21: C2-EP-DR1.1 D2.1 D4.2
N$22: Q3.2 R1_EP_DR1.2
N$23: R1_EP_DR1.1 R_TYPE_SEL.2 SJ1.2
N$24: J1.MP2
N$25: EPD_C2.2 J1.4
N$26: EPD_C1.2 J1.5
N$27: EPD_C6.2 J1.18
N$28: EPD_C7.2 J1.19
N$29: EPD_C8.2 J1.20
N$30: EPD_C9.2 J1.21
N$31: EPD_C10.2 J1.22
N$32: EPD_C11.2 J1.23
N$33: EPD_C12.2 J1.24
N$34: C32.1 IC2.A2
N$35: J4.A5 R1_USB.2
N$36: J4.B5 R2_USB.1
N.C: C9.2
OUT+: IC2.A3 TP_OP.TP
OUT-: IC2.C3 TP_ON.TP
P0.04: U1.P$J1
P0.09: U1.P$L24
P0.13: C30.1 R5.1 SW_UP.2 U1.P$AD6
P0.14: C31.1 R8.1 SW_ENT.2 U1.P$AD8
P0.19: U1.P$AC15
P0.20: U1.P$AD16
P0.21: U1.P$AC17
P0.22: U1.P$AD18
P0.23: U1.P$AC19
P0.24: U1.P$AD20
P0.25: U1.P$AC21
P0.26: U1.P$G1
P0.27: U1.P$H2
P0.28: U1.P$B11
P0.29: U1.P$A10
P0.30: U1.P$B9
P0.31: U1.P$A8
P1.01: Q1.1 R_PWR_EPD.1 U1.P$Y23
P1.02: C29.1 R7.1 SW_DN12.2 U1.P$W24
P1.03: U1.P$V23
P1.04: U1.P$U24
P1.05: U1.P$T23
P1.06: U1.P$R24
P1.07: U1.P$P23
P1.09: U1.P$R1
P1.10: U1.P$A20
P1.11: U1.P$B19
P1.12: U1.P$B17
P1.13: U1.P$A16
P1.14: U1.P$B15
P1.15: U1.P$A14
PMIC_INT: IC1.A1 U1.P$T2
PREVGH: D5.1
PREVGL: D2.2
RESET: J2.6 TP_RESET.TP U1.P$AC13
RF: ANT1.1 C4.1 C22.1 L1.1
SCK: J1.13 U1.P$A12
SCL: IC1.B1 IC2.C1 IC3.12 R4.1 R17.2 TP_SCL.TP U1.P$M2 U3.7
SDA: IC1.C1 IC2.B2 IC3.2 R2.1 R18.2 TD_SDA.TP U1.P$L1 U3.8
SWDCLK: J2.4 TP_SWDCLK.TP U1.P$AA24
SWDIO: J2.2 TP_SWDIO.TP U1.P$AC24
SWO: TP_SWO.TP U1.P$AD22
VBAT: C27.2 C37.1 IC1.C2 TP_VBAT.TP U3.2 U3.3
VBUS: C21.1 C38.1 C42.1 C43.1 D3.5 IC1.A2 J4.A4_B9 J4.A9_B4 U1.P$AD2
VREG: C23.2 C24.2 C39.1 IC1.B2 IC9.A1 IC9.A2 IC9.A3 TP_VREG.TP

## Tracks (layer width: path | path; a pad name or v marks a point on that pad's centre or on a via)
3V3  (via drill 0.3, 0.3 pad 0.41, 0.35, 0.35 pad 0.1)  (1 unrouted)
  Top 0.15: v30.48,7.25 31.46,6.28 31.46,5.2 31.57,5.08 31.61,5.08 R5.2 31.34,4.36 v31.15,4.36 | 32.33,10.88 U1.P$AD14 C7.1 32.33,9.95 31.43,9.05 v31.43,8.24 | U1.P$Y2 29.13,12.25 v28.76,12.25 | C8.1 34.83,11.1 U1.P$AD23
  Top 0.3: IC2.C2 7.32,32.77 7.51,32.77 v7.99,32.29 | v10.27,31.27 10.82,31.27 R17.1 10.95,31.19 IC3.10 | TP1.TP 37.78,28.64 IC9.E3 | IC9.E3 37.79,28.79 37.94,28.79 38.72,29.56 C25.1 | C25.1 39.28,30.89 40.28,31.89 40.28,32.65 TP_3V3.TP | IC9.E2 IC9.E3 | C25.1 40.92,27.92 C33.1 41.7,27.92 42.72,26.9 v42.86,26.9 | R8.2 19.7,2.58 18.97,1.86 | R8.2 19.55,5.42 19.41,5.42 17.62,7.21 R7.2 | R_PWR_EPD.2 17.68,15.83 Q1.2 16.9,16.66 v16.01,17.56 | R_PWR_EPD.2 16.95,15.83 v16.8,15.68 | v18.68,5.02 18.93,5.27 R8.2 | TP2.TP 8.37,24.97 R18.1 | IC3.3 12.46,29.61 C34.2 C19.1 | U1.P$Y2 29.08,12.45 U1.P$W1 28.62,12.49 28.25,12.49 28.21,12.45 C6.1 27.57,11.98 v26.69,11.1 | R_PWR_EPD.2 18.09,15.69 18.29,15.69 18.6,15.38 v18.6,15 | C8.1 34.92,10.5 34.92,9.17 35.08,9.01 36.15,9.01 37.21,10.07 37.21,10.14 39.94,12.87 41.24,12.87 42.01,12.1 42.34,12.1 | J2.1 42.5,10.33 42.19,10.64 42.19,11.94 42.34,12.1 | 42.34,12.1 | IC3.7 12.85,31.26 13.15,31.26 | 13.15,31.26 15.39,31.26 15.6,31.05 15.6,28.91 14.09,27.4 13.65,27.4 13.43,27.63 12.78,27.63 12.61,27.45 | R18.1 11.75,28.31 | C19.1 12.44,28.33 R18.1 | J2.1 42.83,9.71 44.42,9.71 44.88,9.26 v44.88,8.65 | C19.1 12.46,27.6 12.61,27.45 | v30.7,5.37 31.21,4.85 R5.2 | J2.1 42.5,9.45 v41.9,10.05 | IC3.10 11.43,31.26 | 12.61,27.45 12.84,27.22 v12.84,25.94 | IC3.10 11.43,31.41 11.97,31.95 12.47,31.95 13.15,31.26
  Route15 0.15: v28.76,12.25 28.76,10.66 28.79,10.63 28.79,5.67 30.1,4.36 v31.15,4.36
  Route15 0.3: v16.8,15.68 17.44,15.04 17.44,14.01 18.68,12.77 v18.68,5.02 | v42.86,26.9 42.86,21.23 40.27,18.64 40.27,13.17 40.58,12.87 41.24,12.87 41.38,12.73 42.98,12.73 43.11,12.87 44.42,12.87 45.34,11.94 45.34,10.27 44.88,9.81 v44.88,8.65 | v30.7,5.37 33.64,5.37 37.02,8.75 40.6,8.75 v41.9,10.05 | v12.84,25.94 16.01,22.77 v16.01,17.56
  Bottom 0.15: v31.43,8.24 31.45,8.21 31.45,8.19 30.57,7.31 30.48,7.31 v30.48,7.25
  Bottom 0.3: v10.27,31.27 9.19,31.27 8.17,32.29 v7.99,32.29 | v26.69,11.1 26.18,11.61 22.28,11.61 18.89,15 v18.6,15
ALERT  (via drill 0.35)
  Top 0.15: U1.P$J24 35.77,14.75 35.77,14.17 36.19,13.75 v36.19,13.14
  Top 0.152: U3.5 33.39,26.99 33.11,26.99 32.4,26.28 v32.39,26.28
  Bottom 0.15: v36.19,13.14 36.19,14.66 37.29,15.76 37.29,17.12 32.39,22.02 v32.39,26.28
D-  (via drill 0.35)  (1 unrouted)
  Top 0.152: U1.P$AD4 29.83,10.9 29.96,10.76 29.96,8.03 v29.98,8.02 | D3.6 23.18,29.45 23.18,29.22 23.3,29.1 25.39,29.1 v25.45,29.16
  Bottom 0.152: 31.79,10.59 31.79,10.64 31.73,10.69 32,10.69 32.32,11.01 32.32,11.35 31.7,11.97 30.09,11.97 29.67,12.39 29.67,13.88 28.85,14.7 28.85,25.86 31.13,28.14 31.59,28.14 32.93,29.48 32.93,30.61 32.66,30.87 32,30.87 28.48,27.35 27.35,27.35 25.55,29.16 v25.45,29.16 | v29.98,8.02 29.98,8.77 30.62,9.41 30.99,9.41 31.04,9.35 31.4,9.35 31.82,9.77 31.82,10.56
DEC1
  Top 0.15: U1.P$C1 28.82,16.71 C5.1
DFC3
  Top 0.15: U1.P$D23 35.03,16.64 35.03,17.32 35.2,17.5 36.1,17.5 36.47,17.87 C11.1
DFC4_6  (via drill 0.3 pad 0.41)
  Top 0.15: C16.1 32.12,19.74 C15.1 31.16,19.81 30.61,20.36 30.61,20.4 L3.2 | U1.P$B5 30.53,17.64 30.53,17.82 32.14,19.44 C16.1 | C16.1 32.84,19.02 v32.84,18.35 | C10.2 36.02,16.31 36.02,16.18 36.12,16.08 | 36.12,16.08 35.44,16.08 U1.P$E24 | v36.86,15.94 36.74,16.06 36.14,16.06 36.12,16.08
  Bottom 0.15: v32.84,18.35 34.45,18.35 v36.86,15.94
DN  (via drill 0.35)
  Top 0.152: 22.95,32.74 22.95,32.25 v23.17,32.03 | v22.72,26.4 22.72,27.39 D3.1 | J4.B7 22.84,32.85 22.95,32.74 | J4.A7 23.84,32.59 23.68,32.44 23.12,32.44 22.99,32.56 22.99,32.7 22.95,32.74
  Bottom 0.152: v23.17,32.03 22.72,31.58 v22.72,26.4
DP  (via drill 0.35)
  Top 0.152: 24.34,32.85 24.45,32.74 24.45,32.16 v24.38,32.09 | 24.34,32.85 24.3,32.88 24.3,33.88 24.18,34 23.61,34 23.49,33.88 23.49,33.37 J4.A6 | v24.64,26.43 24.63,26.44 D3.3 | J4.B6 24.34,32.85
  Bottom 0.152: v24.64,26.43 23.67,27.41 23.67,30.05 24.38,30.77 v24.38,32.09
EPD_3V3  (via drill 0.35 pad 0.1)
  Top 0.15: EPD_C5.2 J1.15 11.39,16.52 11.68,16.52 12.08,16.92 C1-EP-DR.1 12.79,16.92 13.34,16.37 14.1,16.37 Q1.3 14.8,16.55 v14.91,16.66 | v18.13,18.75 18.88,19.5 L5.1
  Top 0.3: J1.16 J1.15
  Route15 0.15: v18.13,18.75 18.13,18.69 16.41,16.98 15.23,16.98 v14.91,16.66
EPD_BUSY  (via drill 0 pad 0.1 layers 1-2, 0.35 pad 0.1)  (1 unrouted)
  Top 0.15: J1.9 11.09,19.52 10.81,19.52 10.47,19.86 v10.12,19.86
  Route2 0.15: v10.12,19.86 10.22,19.76 | 10.22,19.76
  Bottom 0.15: U1.P$AC11 32.04,11.24 32.04,11.12 31.89,10.97 28.84,10.97 27.75,12.07 27.16,12.07 26.87,12.36 22.42,12.36 16.16,18.62 11.08,18.62 10.14,17.67 10.14,17.15 9.75,16.76 9.33,16.76 9.11,16.99 9.11,19.35 9.61,19.86 v10.12,19.86
  other vias: 31.58,11.7
EPD_CS  (via drill 0 pad 0.1 layers 1-2, 0.35 pad 0.1)  (1 unrouted)
  Top 0.15: 9.69,17.34 9.69,17.15 8.62,16.09 v8.62,15.95
  Top 0.152: 9.69,17.34 10.21,17.87 J1.12
  Bottom 0.15: v8.62,15.95 8.38,16.19 8.38,24.8 5.13,28.05 5.13,32.76 6.01,33.64 10.18,33.64 10.22,33.69 13.34,33.69 13.44,33.79 28.5,33.79 28.64,33.64 30.79,33.64 33.2,31.23 33.2,29.36 31.7,27.86 31.25,27.86 29.33,25.94 U1.P$K2
  other vias: 29.33,14.95
EPD_DC  (via drill 0 pad 0.1 layers 1-2, 0.35 pad 0.1)  (1 unrouted)
  Top 0.152: v10.08,18.45 10.17,18.37 J1.11
  Bottom 0.152: U1.P$AC9 30.55,11.7 30.55,11.69 28.52,11.69 27.79,12.42 27.2,12.42 26.98,12.63 22.54,12.63 16.27,18.9 10.67,18.9 10.22,18.45 v10.08,18.45
  other vias: 31.08,11.7
EPD_RST  (via drill 0.3)
  Top 0.152: J1.10 11.32,18.8 12.09,18.8 12.11,18.78 v12.11,18.06 | U1.P$AD10 31.33,10.98 31.17,10.83 31.17,9.91 v31.29,9.91
  Bottom 0.152: v31.29,9.91 30.95,9.91 30.16,10.69 28.64,10.69 27.55,11.79 27.04,11.79 26.75,12.08 22.31,12.08 16.32,18.06 v12.11,18.06
GDR
  Top 0.15: J1.2 11.39,23.02 11.68,23.02 12.6,23.95 R2_EP_DR.2 16.24,23.95 Q3.1
GND  (via drill 0.35 pad 0.1)
  Top 0.15: U1.P$F23 35,15.77 35.57,15.77 35.92,15.43 37.24,15.43 | C8.2 35.69,10.89 35.4,11.17 35.35,11.17 U1.P$74 | IC3.8 IC3.9 12.15,31.42 v12.19,31.42 | U1.P$74 30.58,15.95 U1.P$B7 | v10.11,30.04 10.43,29.72 10.43,29.08 | U1.P$74 U1.P$85 U1.P$89
  Top 0.3: IC9.C1 36.86,29.69 C23.1 36.14,29.5 35.49,29.5 35.46,29.53 35.46,29.89 C38.2 35.09,30.86 C24.1 | IC9.C1 IC9.C2 IC9.C3 | C33.2 42.08,26 43.44,26 44.05,26.61 44.05,26.94 41.43,29.56 C25.2 | U3.9 34.87,26.07 34.87,25.92 35.13,25.65 U3.1 35.57,25.6 C27.1 36.87,25.21 v37.31,25.21 | U3.4 35.43,27.06 35.05,27.06 34.87,26.88 34.87,26.73 U3.9 | U3.9 34.19,26.4 34.03,26.56 33.64,26.56 U3.6 | IC1.D2 32.98,27.91 R9.1 32.02,27.46 30.89,26.34 v30.89,25.6 | C19.2 12.82,28.85 C34.1 13.01,28.79 v13.87,27.92 | v9.61,27.46 9.61,27.85 R3.1 10.43,29.08 9.94,29.08 6.82,32.2 | 6.82,32.2 6.82,32.27 IC2.B1 | J2.5 J2.3 v41.86,8.75 | SW_UP.1 35.15,5.17 35.15,5.56 34.68,6.04 C30.2 33.94,6.18 v33.94,7.31 | v32.91,9.84 32.84,9.92 C7.2 | U1.P$F23 34.18,15.95 U1.P$78 | C10.1 36.6,16.48 36.62,16.46 37.56,16.46 38.48,17.38 | R2_USB.2 24.99,31.13 22.98,31.13 22.05,32.05 22.05,32.19 R1_USB.1 21.02,31.45 20.41,31.45 20.02,31.84 19.34,31.84 19.27,31.92 J4.SH3 19.85,33.22 J4.A1_B12 | 27.91,28.74 J4.SH4 27.37,32.65 J4.A12_B1 | 27.91,28.74 J4.SH2 27.69,28.28 24.22,28.28 24.05,28.11 24.05,28.09 23.87,27.91 | C37.2 28.91,28.74 27.91,28.74 | IC9.C1 IC9.B1 | C22.2 39.05,13.74 v39.42,13.36 | C11.2 C2.1 37.27,18.44 39.64,18.44 40.12,17.95 40.12,16.99 39.52,16.38 38.19,16.38 37.24,15.43 | C1.2 C11.2 | C11.2 37.87,17.99 38.48,17.38 | 38.48,17.38 | 2.29,26.43 2.29,28 3.52,29.22 3.62,29.22 4.37,29.97 4.37,31.03 3.89,31.51 C32.2 4.31,31.8 4.31,31.76 5.55,30.52 6.54,30.52 6.82,30.8 6.82,32.2 | v30.2,24.67 30.52,24.67 31.65,23.54 33.14,23.54 v33.4,23.79 | C3.2 36.58,14 36.58,13.68 37.01,13.24 37.52,13.24 37.68,13.41 37.68,13.64 C22.2
  Top 0.3: C22.2 37.68,13.83 37.68,14.07 37.44,14.31 C4.2
  Bottom 0.15: v10.11,30.04 11.85,31.78 12.19,31.78 | 12.19,31.78 | 12.19,31.78 v12.19,31.42
  Bottom 0.3: v13.87,27.92 13.41,27.46 v9.61,27.46 | v33.94,7.31 33.94,8.82 v32.91,9.84 | v37.31,25.21 35.89,23.79 v33.4,23.79 | v30.2,24.67 30.89,25.36 v30.89,25.6 | v39.42,13.36 43.92,13.36 45.34,11.94 45.34,9.72 45.49,9.57 45.23,9.31 44.46,9.31 44.13,9.63 43.71,9.63 43.71,9.64 43.7,9.63 43.4,9.63 42.52,8.75 v41.86,8.75
  pour Top: 1.43,-4.38 45.12,-4.38 48.48,-1.02 48.48,35.25 45.75,37.98 -1.09,37.98 -2.44,36.64 -2.44,-0.51
  pour Route2: -1.81,37.54 -1.82,37.51 -3.45,35.88 -3.45,-4.17 -1.6,-6.02 44.49,-6.02 48.35,-2.16 48.35,35.12 45.75,37.73 -1.81,37.73
  pour Bottom: -0.81,37.47 -0.8,37.44 -0.8,37.41 -0.81,37.38 -0.81,37.38 -0.81,37.38 -0.94,37.26 -0.94,37.26 -0.94,37.25 -0.95,37.24 -0.96,37.24 -0.96,37.24 -0.97,37.23 -0.98,37.23 -0.98,37.23 -0.98,37.22 -1,37.22 -1.01,37.22 -1.01,37.22 -1.01,37.22 -1.03,37.23 -1.04,37.23 -1.04,37.24 -1.04,37.24 -1.05,37.25 -1.06,37.26 -1.06,37.26 -1.18,37.37 -2.51,37.45 -3.95,36.01 -3.95,-4.93 -2.73,-6.15 46.13,-6.15 46.96,-5.31 46.96,35.25 44.74,37.48 -0.82,37.48
HAPTIC_EN  (via drill 0.35)
  Top 0.152: U1.P$U1 28.67,13.2 28.58,13.1 25.83,13.1 25.59,12.87 24.38,12.87 24,13.24 24,13.6 24.4,14 v24.4,15.1 | IC2.A1 6.22,31.31 v6.08,31.18
  Bottom 0.152: v24.4,15.1 24.38,15.07 22.98,15.07 11.05,27 9.43,27 9.16,27.27 9.16,28.1 v6.08,31.18
IMU_INT1  (via drill 0.3 pad 0.41)
  Top 0.15: IC3.5 13.1,30.02 13.16,30.02 13.71,29.47 v13.71,28.91 | U1.P$N1 28.67,14.2 28.41,13.93 28.04,13.93 28,13.97 27.22,13.97 27.22,13.81 26.79,13.38 24.84,13.38 24.8,13.42 v24.43,13.42
  Bottom 0.15: v13.71,28.91 24.98,17.65 24.98,15.34 25,15.31 25,13.99 v24.43,13.42
IMU_INT2  (via drill 0 pad 0.1 layers 1-2, 0.3 pad 0.41)  (1 unrouted)
  Top 0.15: IC3.6 13.1,30.52 13.21,30.52 13.23,30.5 v14.97,30.5
  Bottom 0.15: U1.P$P2 28.93,13.54 27.57,13.54 27.57,13.68 27.64,13.75 27.64,17.83 v14.97,30.5
  other vias: 29.33,13.95
LX1
  Top 0.15: IC9.B2 IC9.B3
LX2
  Top 0.15: IC9.D2 IC9.D3
N$1
  Top 0.15: R3.2 IC3.1
N$2
  Top 0.152: IC1.D1 32.54,28.72 R9.2
N$3
  Top 0.15: R4.2 36.54,29.17 IC9.D1
N$4
  Top 0.15: IC9.E1 R2.2
N$7
  Top 0.15: U1.P$D2 29.16,16.27 28.08,16.27 C17.1 27.64,16.17 27.64,16.3 27.27,16.68 25.75,16.68 X2.2
N$8
  Top 0.15: U1.P$F2 29.01,15.95 28.95,16 28.7,16 27.9,15.19 C18.1 27.99,15.01 27.99,14.97 27.38,14.36 25.79,14.36 X2.1
N$9
  Top 0.15: U1.P$AC5 29.88,11.5 29.2,11.5 27.84,11.5 C20.1
N$10
  Top 0.15: C9.1 36.54,12.68 36,12.68 35.73,12.95 35.73,13.79 U1.P$N24
N$11  (via drill 0.35 pad 0.1)
  Top 0.15: v6.99,1.4 5.11,3.27 L1.2 | U1.P$H23 35.15,15.45 35.2,15.5 35.45,15.5 36.05,14.9 C3.1 36.86,14.9 37.1,15.14 39.22,15.14 v39.39,15.31
  Bottom 0.15: v39.39,15.31 39.39,14.64 37.2,12.45 37.2,11.71 37.47,11.45 37.84,11.45 39.18,12.79 39.18,12 39.09,11.91 39.09,10.67 42.05,7.71 44.39,7.71 45.27,6.83 45.27,5.59 43.62,3.94 43.62,2.64 43.01,2.03 36.67,2.03 36.55,2.15 7.75,2.15 v6.99,1.4
N$12  (via drill 0.35 pad 0.1)
  Top 0.15: U1.P$B24 36.44,17.2 C1.1 36.64,17.06 36.64,16.93 36.76,16.81 37.21,16.81 37.33,16.93 37.33,17.07 v37.65,17.39 | v41.79,21.09 41.87,21.09 41.92,21.15 X1.1
  Bottom 0.15: v37.65,17.39 41.34,21.09 v41.79,21.09
N$13
  Top 0.15: U1.P$A23 34.83,17.84 35.58,17.84 C2.2 36.64,18.9 36.64,19.03 37.61,20 X1.3
N$14
  Top 0.15: C14.1 28.83,17.69 U1.P$B1
N$15
  Top 0.15: U1.P$B3 29.56,17.22 L2.1
N$17
  Top 0.15: L2.2 30.04,19.56 L3.1
N$18
  Top 0.15: U1.P$A18 33.33,19.57 C13.1
N$19
  Top 0.15: C12.2 U1.P$A22
N$20
  Top 0.15: D5.2 16.44,12.66 17.35,12.66 18.76,14.08 19.17,14.08 C2-EP-DR1.2
  Top 0.152: Q3.3 19.91,21.72 L5.2 19.91,14.82 19.17,14.08
N$21
  Top 0.15: D4.2 20.15,9.94 20.23,9.86 | 20.23,9.86 D2.1 | C2-EP-DR1.1 19.68,12.65 | 19.68,12.65 | 20.23,9.86 20.23,12.1 19.68,12.65
N$22
  Top 0.15: R1_EP_DR1.2 12.83,22.77 13.18,23.11 13.28,23.21 15.37,23.21 16.13,22.45
  Top 0.152: 16.13,22.45 Q3.2
N$23
  Top 0.152: R1_EP_DR1.1 15.1,22.73 R_TYPE_SEL.2 15.34,22.53 15.38,22.53 15.5,22.41 15.5,22.11 16.1,21.51
  Top 0.3: SJ1.2 16.1,21.17 16.1,21.51
N$25
  Top 0.152: J1.4 11.32,21.95 EPD_C2.2
N$26
  Top 0.152: J1.5 12.56,21.37 12.63,21.29 12.7,21.29 EPD_C1.2
N$27
  Top 0.15: J1.18 11.39,15.02 11.68,15.02 12.57,15.91 EPD_C6.2
N$28
  Top 0.15: J1.19 11.39,14.52 11.68,14.52 12.55,15.39 EPD_C7.2
N$29
  Top 0.15: J1.20 11.39,14.02 11.68,14.02 12.53,14.87 EPD_C8.2
N$30
  Top 0.15: J1.21 11.39,13.52 11.68,13.52 12.5,14.34 EPD_C9.2
N$31
  Top 0.15: J1.22 11.39,13.02 11.68,13.02 12.47,13.81 EPD_C10.2
N$32
  Top 0.15: J1.23 11.39,12.52 11.68,12.52 12.41,13.25 EPD_C11.2
N$33
  Top 0.15: EPD_C12.2 J1.24
N$34
  Top 0.152: IC2.A2 6.04,32.7 6.04,32.69 5.79,32.44 5.11,32.44 C32.1
N$35
  Top 0.15: R1_USB.2 22.45,32.73 22.34,32.85 J4.A5
N$36
  Top 0.15: R2_USB.1 25.19,31.88 25.19,32.43 25.34,32.58 J4.B5
OUT+
  Top 0.152: TP_OP.TP 2.74,30.85 2.74,31.94 3.39,32.59 3.39,32.66 4.21,33.49 5.34,33.49 5.46,33.37 IC2.A3
OUT-  (1 unrouted)
  Top 0.152: IC2.C3 7.4,33.55 7.8,33.55 8.04,33.79 8.62,33.79
P0.13
  Top 0.15: SW_UP.2 32.12,5.4 R5.1 32.46,6.04 C30.1 30.33,8.49 U1.P$AD6
P0.14  (via drill 0.3 pad 0.41)
  Top 0.15: C31.1 21.93,6.13 22.58,6.78 25.46,6.78 v27.88,9.2 | R8.1 21.41,5.82 C31.1 | v30.83,8.84 30.79,8.88 30.79,10.84 30.83,10.88 U1.P$AD8 | C31.1 21.72,4.8 SW_ENT.2
  Bottom 0.15: v27.88,9.2 27.88,9.27 28.08,9.27 29.79,7.56 30.16,7.56 30.43,7.83 30.43,8.43 v30.83,8.84
P1.01  (via drill 0 pad 0.1 layers 1-2, 0.35 pad 0.1)  (1 unrouted)
  Top 0.15: Q1.1 17.47,15.28 R_PWR_EPD.1 17.95,15.18 18.1,15.03 v18.1,14.29
  Bottom 0.15: U1.P$Y23 34.83,9.28 37.86,6.24 37.86,2.65 37.52,2.31 36.78,2.31 36.66,2.43 35.92,2.43 35.69,2.66 34.41,2.66 32.94,4.13 31.71,4.13 31.51,3.93 29.19,3.93 18.84,14.29 v18.1,14.29
  other vias: 34.83,12.45
P1.02  (via drill 0.35 pad 0.1)
  Top 0.15: SW_DN12.2 10.43,6.03 C29.1 10.33,6.74 10.07,7 10.07,7.42 10.19,7.54 10.23,7.54 10.38,7.69 | 10.38,7.69 R7.1 | U1.P$W24 35.59,12.7 36.39,11.9 v37.65,11.9 | v8.99,8.18 9.89,8.18 10.38,7.69
  Bottom 0.15: v8.99,8.18 8.23,8.18 7.76,8.65 7.76,24.53 7.26,25.03 1.47,25.03 1.06,25.44 1.06,30.2 1.34,30.48 1.34,30.64 3.46,32.75 3.62,32.75 4.66,33.8 5.38,33.8 5.81,34.23 5.94,34.23 5.98,34.27 10.35,34.27 10.37,34.28 13.15,34.28 13.21,34.34 35.62,34.34 36.14,33.82 41.3,33.82 44,31.12 44,18.62 37.65,12.27 v37.65,11.9
PMIC_INT  (via drill 0 pad 0.1 layers 1-2, 0.35 pad 0.1)  (1 unrouted)
  Top 0.152: 32.6,30.54 32.63,30.51 32.64,30.51 | 32.6,30.54 32.6,29.96 IC1.A1 | 32.6,30.54 v32.47,30.42
  Bottom 0.15: U1.P$T2 28.95,13.06 27.65,13.06 25.25,15.46 25.25,18.6 14.54,29.32 14.54,30.68 15.08,31.21 21.45,31.21 22.43,30.24 22.43,26.78 21.9,26.25 22.47,25.68 24.8,25.68 26.19,27.07 28.59,27.07 28.75,27.23
  Bottom 0.152: v32.47,30.42 31.94,30.42 28.75,27.23
  other vias: 29.33,13.45
RESET  (via drill 0 layers 1-2, 0.3)  (1 unrouted)
  Top 0.15: 37.48,2.8 38.16,2.12 TP_RESET.TP | 37.48,2.8 37.22,3.06 37.22,7.41 38.35,8.54 39.02,8.54 39.45,8.11 J2.6 | 37.48,2.8 37.38,2.8 v37.31,2.88
  Bottom 0.15: v37.31,2.88 37.31,6.41 32.59,11.12 32.59,11.47 32.25,11.81
  other vias: 32.08,11.7
RF  (via drill 0.35 pad 0.1)
  Top 0.15: v5.04,9.29 5.04,8.63 4.8,8.4 | 4.8,8.4 3.95,7.54 | v42.75,16.46 42.15,15.86 ANT1.1 42.01,14.44 41.9,14.55 37.98,14.55 37.66,14.87 37.22,14.87 36.93,14.58 C4.1 36.93,14.07 C22.1 | 4.8,8.4 4.8,8.04 L1.1
  Bottom 0.15: v5.04,9.29 5.8,9.29 6.76,10.25 7.14,10.25 7.35,10.45 7.35,24.54 7.14,24.75 0.7,24.75 0.35,25.09 0.35,28.02 0.45,29.15 0.75,30.27 0.88,30.54 1.07,30.73 1.07,30.75 3.35,33.03 3.37,33.03 4.46,34.12 5.32,34.12 5.7,34.5 5.82,34.5 5.87,34.55 7,34.65 35.7,34.65 36.23,34.12 41.54,34.12 41.66,34.07 45,30.72 45,19.12 42.09,16.21 42.5,16.21 v42.75,16.46
SCK  (via drill 0.35 pad 0.1)
  Top 0.15: U1.P$A12 31.83,18.27 v31.85,18.29 | v8.27,14.36 9.98,16.08 9.98,16.58 10.63,17.22 11.09,17.22 J1.13
  Bottom 0.15: v31.85,18.29 32.59,19.03 32.59,21.31 31.23,22.66 31.23,24.17 31.73,24.67 31.73,25.63 33.41,27.31 35.8,27.31 36.22,26.89 36.59,26.89 37.57,27.87 37.57,32.39 37.12,32.85 36.72,32.85 35.5,34.07 13.32,34.07 13.26,34.01 10.48,34.01 10.44,33.97 10.11,33.97 10.09,33.95 5.93,33.95 4.46,32.48 3.57,32.48 1.62,30.52 1.62,29.51 5.83,25.3 7.38,25.3 7.77,24.91 7.88,24.91 8.04,24.76 8.04,14.59 v8.27,14.36
SCL  (via drill 0 pad 0.1 layers 1-2, 0.35, 0.35 pad 0.1)  (2 unrouted)
  Top 0.15: IC2.C1 8.98,30.61 R17.2 | IC3.12 11.25,30.31 11.14,30.31 11.03,30.43 11.03,30.51 R17.2 | R17.2 10.84,30.7 10.2,30.7 9.81,31.08 9.81,32.21 10.12,32.52 11.47,32.52 11.56,32.43 14.16,32.43 TP_SCL.TP | 35.85,29.13 35.9,29.08 36.09,28.89 36.09,27.66 v36.41,27.34
  Top 0.152: 35.9,29.08 R4.1 | 33.39,26.31 33.44,26.26 | 33.44,26.26 U3.7 | IC1.B1 32.48,29.66 32.33,29.66 v31.15,30.84 | v17.09,33.06 16.64,33.51 TP_SCL.TP | 35.85,29.13 35.43,28.72 35.43,27.76 35.16,27.49 33.11,27.49 32.92,27.3 32.92,27.26 32.4,26.74 32.2,26.74 31.93,26.47 31.93,26.1 32.2,25.83 32.95,25.83 33.11,25.99 33.17,25.99 33.44,26.26
  Bottom 0.15: 29.41,14.53 29.61,14.72 29.61,25.83 31.37,27.59 35.97,27.59 36.22,27.34 v36.41,27.34
  Bottom 0.152: v17.09,33.06 17.39,33.37 18.87,33.37 18.95,33.44 28.46,33.44 31.05,30.84 v31.15,30.84
  other vias: 29.33,14.45
SDA  (via drill 0 layers 1-2, 0.3, 0.35, 0.35 pad 0.1)  (3 unrouted)
  Top 0.15: R18.2 11.73,29.33 11.78,29.38 11.78,29.49 IC3.2 12.07,29.79 12.07,29.9 12.27,30.1 v12.27,30.32 | IC1.C1 32.48,29.06 32.02,29.06 31.98,29.02 v31.82,29.02 | U1.P$L1 28.53,14.7 v28.22,14.39 | v13.74,33.34 13.62,33.21 12.1,33.21 | TD_SDA.TP 12.06,33.21 v10.69,33.21
  Top 0.152: IC1.C1 32.48,29.06 32.45,29.06 31.25,27.86 31.25,27.19 30.38,26.32 30.38,25.3 31.79,23.89 U3.8 34.57,24.63 38.28,24.63 38.28,26.3 36.65,27.93 36.65,27.96 R2.1
  Bottom 0.15: v28.22,14.39 28.22,14.58 28.2,14.6 28.23,14.63 28.23,25.63 31.02,28.42 31.22,28.42 v31.82,29.02 | v13.74,33.34 | v10.69,33.21 10.35,32.87 IC2.B2 | v13.74,33.34 13.74,31.79 v12.27,30.32
  other vias: 6.72,32.87 6.72,32.87
SWDCLK  (via drill 0.3 pad 0.41)
  Top 0.15: 40.85,3.3 40.85,4.35 42.09,5.59 42.09,6.83 41.23,7.7 J2.4 | 40.85,3.3 v40.33,3.83 | 40.85,3.3 TP_SWDCLK.TP | U1.P$AA24 36.32,11.2 v36.66,11.2
  Bottom 0.15: v40.33,3.83 40.39,3.89 40.39,4.29 39.09,5.59 39.09,6.83 39.49,7.24 39.49,8.07 39.02,8.54 37.96,8.54 35.4,11.11 35.4,11.6 35.63,11.83 36.25,11.2 v36.66,11.2
SWDIO  (via drill 0.3 pad 0.41)
  Top 0.15: v42.3,4.87 42.31,4.87 42.67,4.51 42.67,4.16 TP_SWDIO.TP 44.36,3.68 44.54,3.86 44.41,3.98 44.41,4.63 | 44.41,4.63 45.27,5.48 45.27,6.83 44.39,7.71 42.9,7.71 J2.2 | 44.41,4.63 43.56,3.78 43.56,3.37 | U1.P$AC24 35.85,11.17 35.91,11.17 36.86,10.22 36.32,9.68 v35.62,9.68
  Bottom 0.15: v42.3,4.87 42.3,4.9 42.09,5.11 42.09,6.83 40.1,8.82 38.49,8.82 37.09,10.22 37.09,11.38 36.37,12.1 35.51,12.1 35.12,11.71 35.12,10.99 35.62,10.49 v35.62,9.68
SWO  (via drill 0.3 pad 0.41)
  Top 0.15: U1.P$AD22 33.95,10.82 33.95,9.88 32.09,8.02 v32.09,7.67 | v30.62,6.28 29.79,5.46 29.79,2.76 TP_SWO.TP
  Bottom 0.15: v32.09,7.67 30.69,6.27 30.62,6.27 v30.62,6.28
VBAT  (via drill 0 pad 0.1 layers 1-2, 0.35 pad 0.1)  (1 unrouted)
  Top 0.152: U3.2 | U3.2 C27.2 | U3.3 U3.2
  Top 0.3: C27.2 37.14,26.15 v37.16,26.13 | v29.36,30.61 29.86,30.61 30.94,29.53 | 30.94,29.53 C37.1 30.97,30.1 v29.89,31.18 | TP_VBAT.TP 30.94,28.58 30.94,29.53
  Route15 0.3: v37.16,26.13 36.61,26.69 35.99,26.69 34.78,27.89 31.17,27.89 29.36,29.69 v29.36,30.61 | IC1.C2 32.6,29.16 32.09,29.67 31.39,29.67 v29.89,31.18
  other vias: 32.98,29.16
VBUS  (via drill 0.35 pad 0.1)
  Top 0.15: U1.P$AD2 29.33,10.35 C21.1 28.27,10.33 v28.21,10.39 | 26.1,32.74 25.99,32.85 | 25.99,32.85 25.8,33.03 25.8,33.87 25.4,34.28 21.89,34.28 21.49,33.88 21.49,33.52 J4.A4_B9 | 34.29,32.05 32.73,32.05 30.44,34.34 26.75,34.34 26.29,33.88 26.29,32.93 26.1,32.74 | 34.29,32.05 34.3,32.05 | D3.5 24.13,30.35 24.13,30.58 24.25,30.7 25.36,30.7 v25.48,30.82 25.87,31.21 25.87,31.81 25.86,31.82 25.86,32.49 26.1,32.74 | 25.99,32.85 J4.A9_B4 | 34.29,32.04 34.29,32.05
  Top 0.3: 34.3,32.05 C43.1 | 34.29,32.04 34.17,32.04 34.01,31.88 34.01,31.27 33.73,30.99 33.24,30.99 C42.1 33.13,30.11 IC1.A2 33.28,30.26 C38.1
  Route15 0.15: v28.21,10.39 28.21,12.25 26.03,14.43 26.03,30.28 v25.48,30.82
VREG  (via drill 0.35 pad 0.1)
  Top 0.3: TP_VREG.TP 38.52,31.11 IC9.A3 IC9.A2 IC9.A1 36.64,30.37 C23.2 36.33,30.92 C24.2 35.94,31.4 v36.93,32.39 | IC1.B2 33,29.54 33.13,29.54 33.58,29.09 C39.1 33.58,28.51 v34.22,29.15
  Route15 0.3: v36.93,32.39 36.93,31.86 v34.22,29.15
(copper drawn outside any net)
  shapes: Bottom area x1, Route2 area x1, Top area x1